# Altium PCB RTL8211.PcbDoc
Units mil, origin at the board's own origin, x right, y up, seen from the top; angles counter-clockwise.
Board outline 2605.89 x 1607.43 mil, 2 copper layers (Top Layer, Bottom Layer); 64 components, 66 nets, 272 pads, 9 vias.
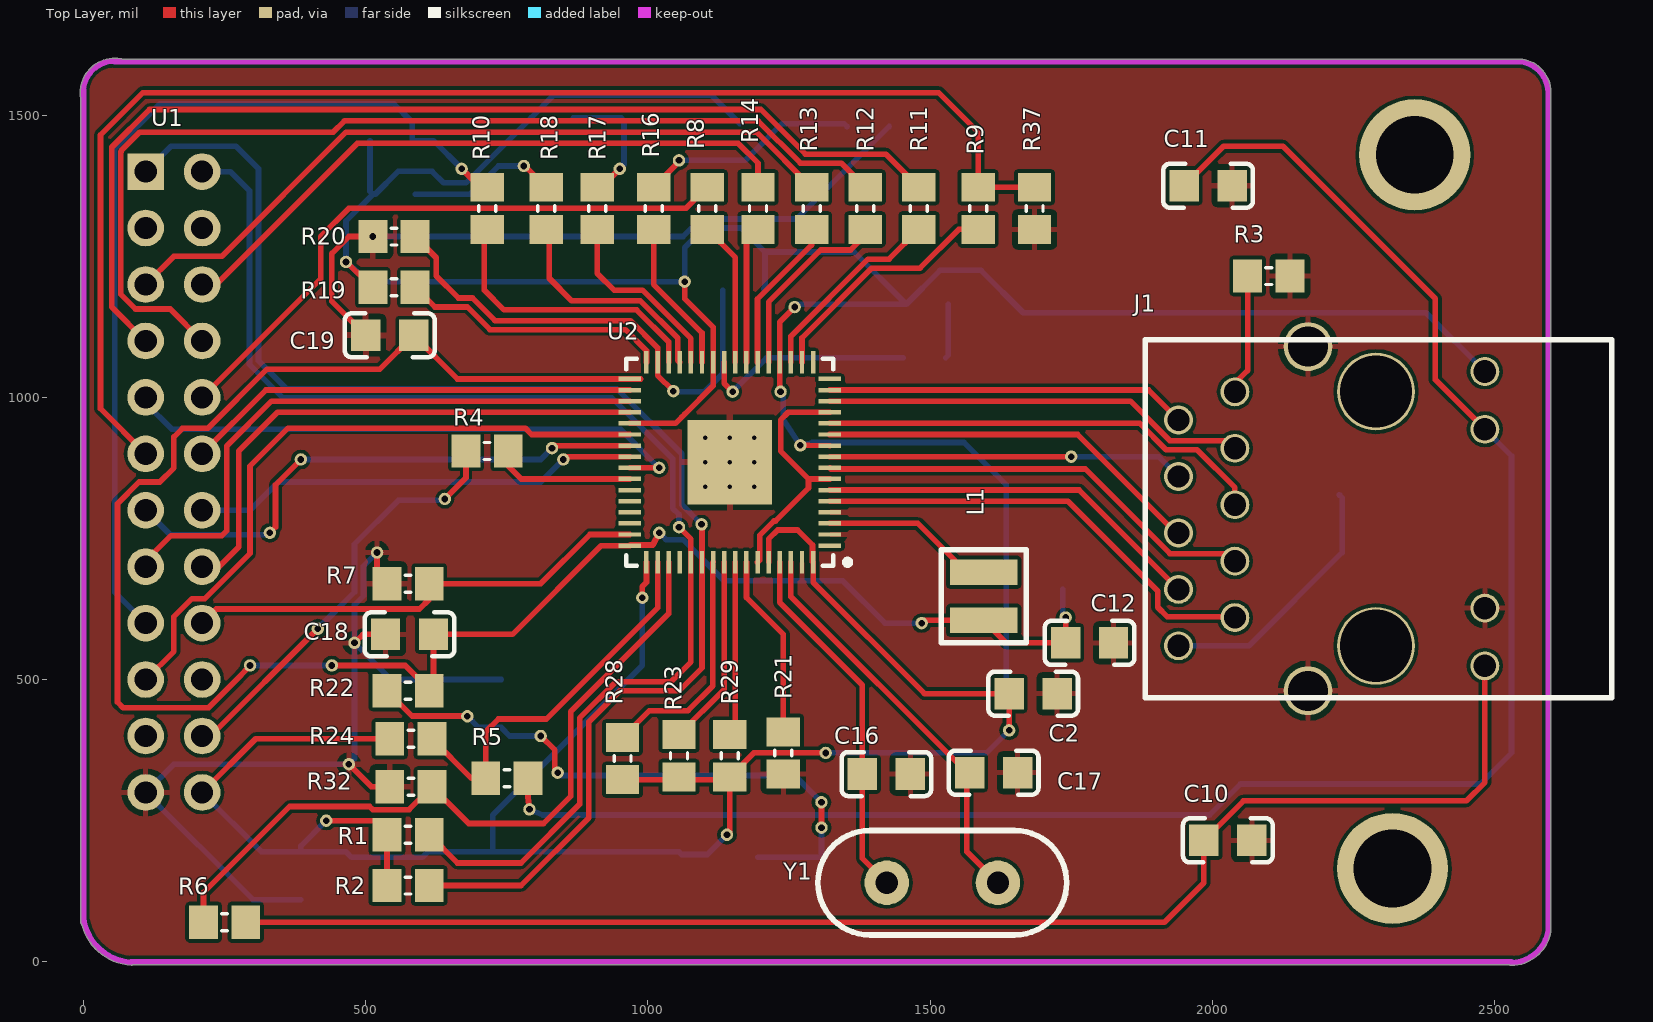
[diagram p0: Top Layer view]
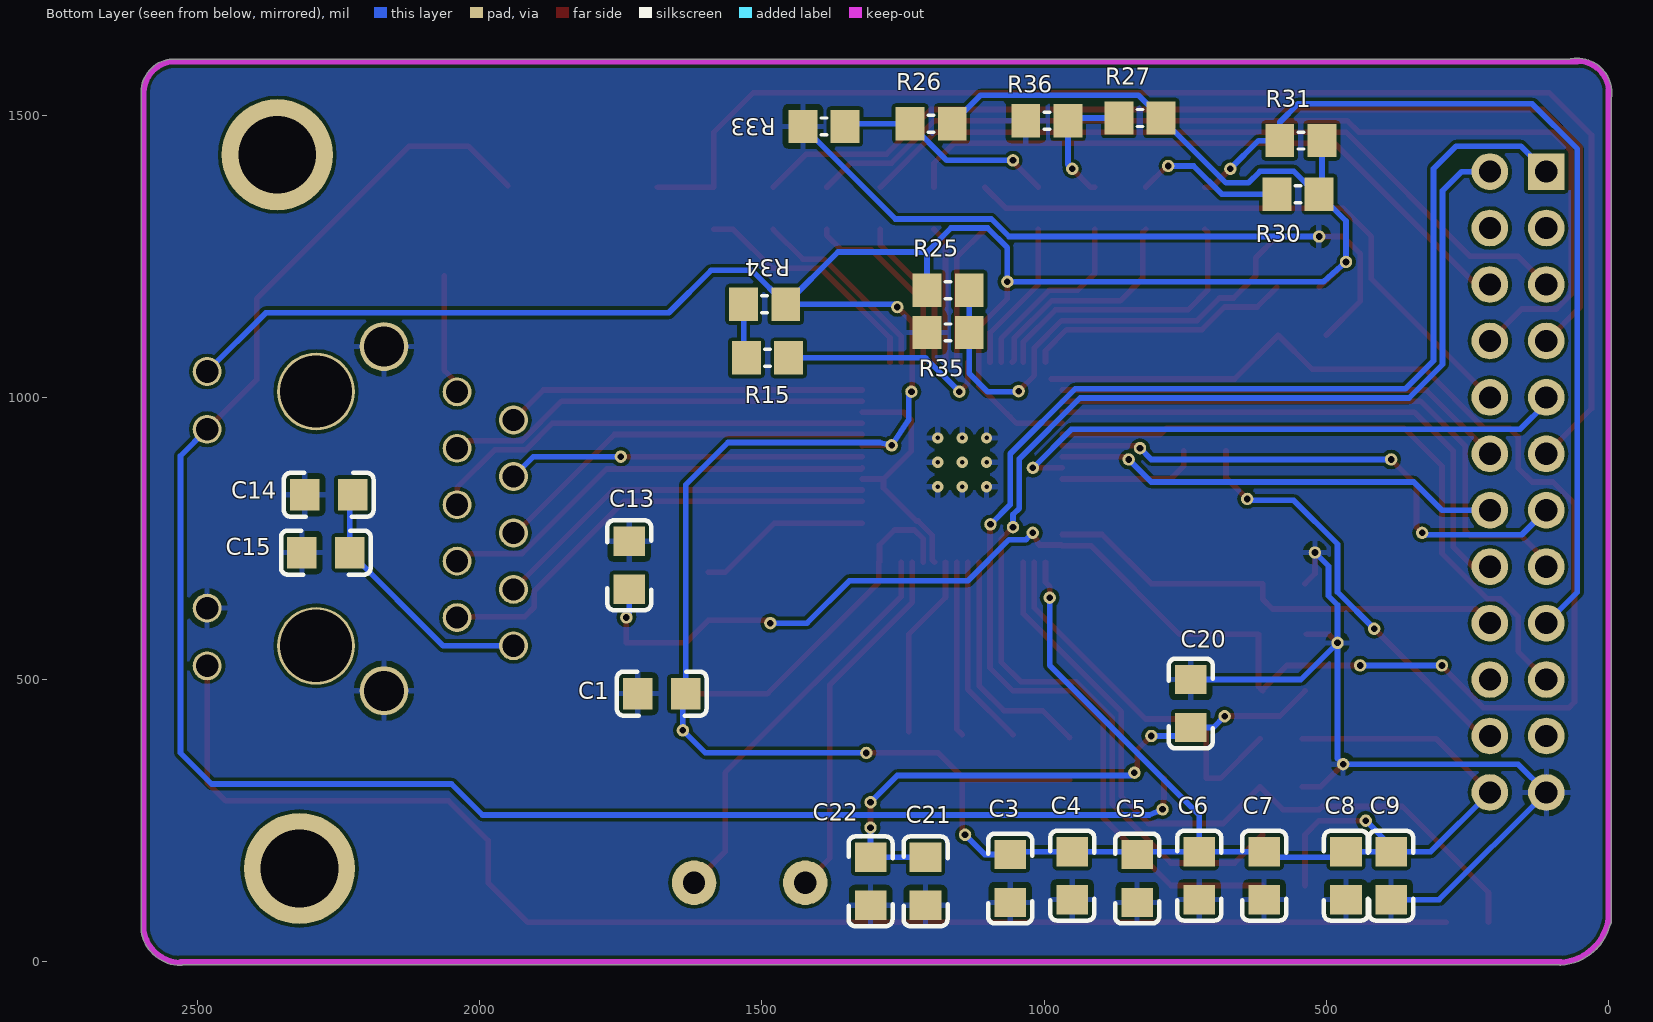
[diagram p1: Bottom Layer view, seen from below]

## Layer stack, top to bottom
Top Solder: solder mask 0.4, Solder Resist, Dk 3.5
Top Layer: signal copper 1.4
Dielectric1: dielectric 12.6, FR-4, Dk 4.8
Bottom Layer: signal copper 1.4
Bottom Solder: solder mask 0.4, Solder Resist, Dk 3.5

## Board outline
-3.27,66.19 cw(c0,70) -5.01,70 -5.01,1529.56 cw(c55,1540) 65.9,1599.93 cw(c65,1595) 67.21,1599.5 2547.78,1599.5 cw(c2547.78,1594.49) 2549.14,1599.32 cw(c2540,1540) 2599.61,1546.98 cw(c2595,1545) 2600.02,1545 2600.02,55 cw(c2595,55) 2599.96,54.24 cw(c2529.07,65.14) 2530.09,-6.57 cw(c2530.02,-1.56) 2526.39,-5.02 87.76,-5.02 cw(c84.64,-1.08) 84.35,-6.09 cw(c90,90)

## Design rules (kind name [scope] priority, off if disabled: settings)
Clearance [All] p1: gap=6 ignorepadtopadclearanceinfootprint=FALSE except(0: Arc-Hole Track-Hole SMDPad-Hole THPad-Hole Via-Hole Fill-Hole Poly-Hole Region-Hole Text-Hole)
ComponentClearance [All] p1: gap=0 collisioncheckmode=3 verticalgap=10 showdistances=FALSE
Height [All] p1: minheight=0 maxheight=1000 prefheight=0
HoleSize [All] p1: absolutevalues=TRUE maxlimit=138 minlimit=1 maxpercent=80.000 minpercent=20.000
MinimumSolderMaskSliver [All] p1: minsoldermaskwidth=3.8
PolygonConnect [All] p1: connectstyle=Relief reliefconductorwidth=10 reliefentries=4 polygonreliefangle="90 Angle" airgapwidth=10
RoutingVias [All] p1: holewidth=28 width=50 viastyle="Through Hole" minholewidth=28 minwidth=50 maxholewidth=28 maxwidth=50
SilkToSilkClearance [All] p1: silktosilkclearance=0
SilkToSolderMaskClearance [IsPad] p1: minsilkscreentomaskgap=0 clearancetoexposedcopper=TRUE
SolderMaskExpansion [All] p1: expansion=4
Width [All] p1: maxlimit=10 minlimit=6 preferedwidth=10 minimp=50.000000 maximp=50.000000 favimp=50.000000
24 further rules are at their usual default settings.

## Components (designator, comment, footprint, x,y, rotation, side; value= is the part's Value field where it differs from the comment)
C1 "22uF" 0805C 1680,480 r180 bottom
C2 "0.1uF" 0805C 1685,470 r180 top
C3 "22uF" 0805C 1065,145 r90 bottom
C4 "0.1uF" 0805C 955,150 r90 bottom
C5 "0.1uF" 0805C 840,145 r90 bottom
C6 "0.1uF" 0805C 730,150 r90 bottom
C7 "0.1uF" 0805C 615,150 r90 bottom
C8 "0.1uF" 0805C 470,150 r90 bottom
C9 "0.1uF" 0805C 390,150 r90 bottom
C10 "0.1uF" 0805C 2030,210 r180 top
C11 "0.1uF" 0805C 1995,1370 r180 top
C12 "22uF" 0805C 1785,560 r180 top
C13 "0.1uF" 0805C 1730,705 r270 bottom
C14 "0.1uF" 0805C 2270,832.4 r180 bottom
C15 "0.1uF" 0805C 2275,730 r180 bottom
C16 "22pF" 0805C 1425,327.6 r180 top
C17 "22pF" 0805C 1615,330 r180 top
C18 "0.1uF" 0805C 575,585 r0 top
C19 "0.1uF" 0805C 540,1115 r0 top
C20 "0.1uF" 0805C 735,460 r270 bottom
C21 "0.1uF" 0805C 1215,140 r90 bottom
C22 "0.1uF" 0805C 1312.4,140 r90 bottom
J1 "HR911130A" HR911130A 1940,785 r270 top
L1 "2.2uH" Coil 1595,690 r270 top
R1 "Res" 0805 575,225 r180 top
R2 "Res" 0805 575,135 r180 top
R3 "Res" 0805 2100,1215 r180 top
R4 "Res" 0805 715,905 r180 top
R5 "Res" 0805 750,325 r180 top
R6 "Res" 0805 250,70 r180 top
R7 "Res" 0805 575,670 r180 top
R8 "Res" 0805 1105,1335 r90 top
R9 "Res" 0805 1585,1335 r90 top
R10 "Res" 0805 715,1335 r90 top
R11 "Res" 0805 1480,1335 r90 top
R12 "Res" 0805 1385,1335 r90 top
R13 "Res" 0805 1290,1335 r90 top
R14 "Res" 0805 1195,1335 r90 top
R15 "Res" 0805 1490,1070 r0 bottom
R16 "Res" 0805 1010,1335 r90 top
R17 "Res" 0805 910,1335 r90 top
R18 "Res" 0805 820,1335 r90 top
R19 "Res" 0805 550,1195 r180 top
R20 "Res" 0805 550,1285 r180 top
R21 "Res" 0805 1240,370 r270 top
R22 "Res" 0805 575,480 r180 top
R23 "Res" 0805 1055,365 r270 top
R24 "Res" 0805 580,395 r180 top
R25 "Res" 0805 1170,1190 r180 bottom
R26 "Res" 0805 1200,1485 r0 bottom
R27 "Res" 0805 830,1495 r0 bottom
R28 "Res" 0805 955,360 r90 top
R29 "Res" 0805 1145,365 r90 top
R30 "Res" 0805 550,1360 r0 bottom
R31 "Res" 0805 545,1455 r0 bottom
R32 "Res" 0805 580,310 r180 top
R33 "Res" 0805 1390,1480 r180 bottom
R34 "Res" 0805 1495,1165 r0 bottom
R35 "Res" 0805 1170,1115 r180 bottom
R36 "Res" 0805 995,1490 r180 bottom
R37 "Res" 0805 1685,1335 r270 top
U1 "MII" MII 110,200 r0 top
U2 "RTL8211EG" RTL8211EGQFN 1145,885 r180 top
Y1 "25MHz" XTAL 1425,140 r0 top

## Footprints (in the part's own frame and the unit in brackets; to place one, negate y for a bottom-side part, rotate by r counter-clockwise, add the part's x,y. Pads: shape width x height; smd on the part's side, far side on the other; paste and mask are expansions set on the pad)
0805 [mm]
  rect 1.3x1.5 smd: 1(-0.95,0) 2(0.95,0)
  silkscreen extent -0.13,-0.38 0.13,0.38
0805C [mil]
  rect 52x56 smd: 1(-40,-5) 2(45,-5)
  silkscreen extent -77,-44 82,34
Coil [mm]
  rect 1.14x3.05 smd: 1(0,0) 2(2.16,0)
  silkscreen extent -1.02,-1.91 3.18,1.91
HR911130A [mm]
  round 1.3 hole 1: 1(5.72,0) 2(4.45,2.54) 3(3.18,0) 4(1.91,2.54) 5(0.64,0) 6(-0.63,2.54) 7(-1.9,0) 8(-3.17,2.54) 9(-4.44,0) 10(-5.71,2.54)
  round 1.3 hole 1.02: 11(6.624,13.79) 12(4.025,13.79) 13(-4.025,13.79) 14(-6.625,13.79)
  round 2.2 hole 1.8: 15(7.745,5.83) 16(-7.745,5.83)
  round 3.5 hole 3.25: 17(5.721,8.89) 18(-5.721,8.89)
  silkscreen extent -8.05,-1.5 8.05,19.5
MII [mm]
  rect 1.65x1.65 hole 1: 1(0,30.48)
  round 1.65 hole 1: 2(0,27.94) 3(0,25.4) 4(0,22.86) 5(0,20.32) 6(0,17.78) 7(0,15.24) 8(0,12.7) 9(0,10.16) 10(0,7.62) 11(0,5.08) 12(0,2.54) 13(2.54,2.54) 14(2.54,5.08) 15(2.54,7.62) 16(2.54,10.16) 17(2.54,12.7) 18(2.54,15.24) 19(2.54,17.78) 20(2.54,20.32) 21(2.54,22.86) 22(2.54,25.4) 23(2.54,27.94) 24(2.54,30.48)
RTL8211EGQFN [mm] "QFN, 64-Leads, Body 9.00x9.00mm, Pitch 0.50mm, Thermal Pad 3.80x3.80mm, IPC Medium Density"
  rect 1x0.2 smd: 1(-4.5,3.75) 2(-4.5,3.25) 3(-4.5,2.75) 4(-4.5,2.25) 5(-4.5,1.75) 6(-4.5,1.25) 7(-4.5,0.75) 8(-4.5,0.25) 9(-4.5,-0.25) 10(-4.5,-0.75) 11(-4.5,-1.25) 12(-4.5,-1.75) 13(-4.5,-2.25) 14(-4.5,-2.75) 15(-4.5,-3.25) 16(-4.5,-3.75) 33(4.5,-3.75) 34(4.5,-3.25) 35(4.5,-2.75) 36(4.5,-2.25) 37(4.5,-1.75) 38(4.5,-1.25) 39(4.5,-0.75) 40(4.5,-0.25) 41(4.5,0.25) 42(4.5,0.75) 43(4.5,1.25) 44(4.5,1.75) 45(4.5,2.25) 46(4.5,2.75) 47(4.5,3.25) 48(4.5,3.75)
  rect 0.2x1 smd: 17(-3.75,-4.5) 18(-3.25,-4.5) 19(-2.75,-4.5) 20(-2.25,-4.5) 21(-1.75,-4.5) 22(-1.25,-4.5) 23(-0.75,-4.5) 24(-0.25,-4.5) 25(0.25,-4.5) 26(0.75,-4.5) 27(1.25,-4.5) 28(1.75,-4.5) 29(2.25,-4.5) 30(2.75,-4.5) 31(3.25,-4.5) 32(3.75,-4.5) 49(3.75,4.5) 50(3.25,4.5) 51(2.75,4.5) 52(2.25,4.5) 53(1.75,4.5) 54(1.25,4.5) 55(0.75,4.5) 56(0.25,4.5) 57(-0.25,4.5) 58(-0.75,4.5) 59(-1.25,4.5) 60(-1.75,4.5) 61(-2.25,4.5) 62(-2.75,4.5) 63(-3.25,4.5) 64(-3.75,4.5)
  rect 3.8x3.8 smd: 65(0,0)
  silkscreen extent -5.43,-4.65 4.65,4.65, body extent -4.5,-4.5 4.5,4.5, height 1
XTAL [mm]
  round 2 hole 1: 1(-0.047,0) 2(4.953,0)
  silkscreen extent -3.15,-2.35 8.05,2.35

## Part data
C1 C2 C3 C4 C5 C6 C7 C8 C9 C10 C11 C12 C13 C14 C15 C16 C17 C18 C19 C20 C21 C22: library part Cap, "Capacitor"
L1: library part Coil
R1 R2 R3 R4 R5 R6 R7 R8 R9 R10 R11 R12 R13 R14 R15 R16 R17 R18 R19 R20 R21 R22 R23 R24 R25 R26 R27 R28 R29 R30 R31 R32 R33 R34 R35 R36 R37: "Resistor"
Y1: library part XTAL

## Free pads (board coordinates)
  round 22.05 hole 11.81: 0(1065,1205) 4(465,1240) 5(1260,1160) 6(1150,1010) 7(1750,895) 9(790,270) 11(990,645) 14(1307.5,237.5) 15(1307.4,282.6) 16(840,335) 17(810,400) 18(430,250) 18(680,435) 21(830,910) 22(850,890) 23(1019.84,875.16) 25(415,590) 27(640,820) 29(1055,770) 30(1095,775) ""(295,525) ""(330,760) ""(385,890) ""(440,525) ""(470,350) ""(480,565) ""(512.6,1285) ""(520,725) ""(670,1405) ""(780,1410) ""(950,1405) ""(1020,760) ""(1045,1011.07) ""(1055,1420) ""(1140,225) ""(1235,1010) ""(1270,914.96) ""(1315,370) ""(1485,600) ""(1640,410) ""(1740,610)
  round 196.85 hole 137.8: ""(2319.25,165.12) ""(2358.62,1429.88)

## Via types
v1: diameter 19.68, hole 7.87, Top Layer to Bottom Layer, 9 vias

## Nets (pads, with @x,y where several pads share a name; then routed paths per layer and width w, separated by ;. In a path a pad name is that pad's centre, name@x,y a point inside that pad or via, vN(x,y) a via of type N, cw(c..) or ccw(c..) an arc to the next point about the centre after c; other vN are vias at no path point)
3.3V: C1.2 C2.2 C3.2 C4.2 C5.2 C6.2 C7.2 C8.2 C9.2 J1.14 pad.0 pad.4 pad.5 pad.11 pad.18@430,250 pad.@1140,225 pad.@1235,1010 pad.@1270,914.96 pad.@1315,370 pad.@1640,410 R1.2 R2.2 R19.2 R23.2 R24.2 R25.1 R26.1 R27.1 R28.1 R29.1 R30.1 R31.1 R34.1 U1.13 U2.10 U2.20 U2.26 U2.37 U2.49 U2.60 U2.64 | length 8936.9
  Top Layer w10: U1.13 305,395 R24.2 ; pad.18@430,250 512.6,250 R1.2 R2.2 ; pad.4 R19.2 ; R28.1 R29.1@1140,322.6 ; U2.37 1048.9,953.9 1059.2,964.2 1059.2,964.36 1065.64,970.8 1065.8,970.8 1115.47,1020.47 U2.26 1115.47,1124.53 1065,1175 pad.0 ; pad.11 990,665 997.36,672.36 U2.49 ; pad.@1140,225 1145,230 R29.1 1187.4,370 pad.@1315,370 ; U2.60 1213.9,748.9 1230,765 1265,765 1291.48,738.52 1291.48,708.99 U2.64 1292.64,672.36 1490,475 C2.2 pad.@1640,410 ; pad.@1235,1010 1233.58,1011.42 U2.20 1233.58,1133.58 pad.5 ; 1285,915 1270,914.96 U2.10
  Bottom Layer w10: U1.13 315,195 C9.2 ; pad.18@430,250 385,205 C9.2 ; R31.1 507.6,1365 R30.1 ; pad.11 990,525 725,260 C6.2 ; pad.@1140,225 1105,190 C3.2 1055,195 C4.2 C6.2 ; R26.1 1112.07,1535.53 833.13,1535.53 R27.1 677.6,1380 638.08,1380 617.55,1400.53 557.26,1400.53 516.73,1360 R30.1 ; R25.1@1205,1192.4 R25.1 1207.4,1257.6 ; pad.@1235,1010 1240,1005 1240,960 1270,914.96 1290.94,920 1560,920 1635,845 C1.2 1640,470 1640,410 1600,370 pad.@1315,370 ; pad.5 1265,1165 R34.1 ; J1.14 2378.74,1150 1665,1150 1590,1225 1517.6,1225 R34.1 ; C9.2 C8.2 475,185 600,185 C7.2 C6.2 ; R30.1 465,1312.4 pad.4 505,1205 pad.0 1065,1265 1100,1300 1165,1300 1207.4,1257.6 ; 1207.4,1257.6 1365,1257.6 R34.1
AVDD10: U2.7 U2.13 U2.59 | length 442.1
  Top Layer w10: U2.59 1197.9,711.52 1197.9,755.53 1223.37,781 1226,781 1284.53,839.53 1284.53,855.47 ; U2.7 1284.53,855.47 ; U2.13 1248.58,973.58 1235,960 1235,905 1284.53,855.47
COL: pad.@1045,1011.07 R20.1 R25.2 R35.2 U2.31 | length 867.7
  Top Layer w10: R20.1 625,1247.4 625,1215 664,1176 689,1176 729,1136 969,1136 1017.05,1087.95 U2.31 1017.05,1039.02 pad.@1045,1011.07
  Bottom Layer w10: pad.@1045,1011.07 1046.07,1010 1100,1010 1132.6,1042.6 R35.2 R25.2
CRS: R19.1 U2.32 | length 477
  Top Layer w10: R19.1 622.4,1160 680,1160 720,1120 960,1120 997.36,1082.64 U2.32
DVDD10: C12.2 C13.2 C18.2 C19.2 L1.2 pad.@295,525 pad.@440,525 pad.@1020,760 pad.@1485,600 pad.@1740,610 R22.1 U2.33 U2.48 | length 3558.6
  Top Layer w10: pad.@295,525 275,503.51 221.49,450 70,450 60,460 60,811.49 98.51,850 135,850 160,875 160,930 175,945 220,945 325,1050 525,1050 C19.2 662.36,1032.64 U2.33 U2.33@987.36,1032.64 ; pad.@440,525 570,525 612.4,482.6 R22.1 620,487.6 C18.2 760,580 917.36,737.36 U2.48 968.99,738.52 1008.52,738.52 pad.@1020,760 ; pad.@1485,600 1489.96,604.96 L1.2 1634.96,565 C12.2 pad.@1740,610
  Bottom Layer w10: pad.@295,525 pad.@440,525 ; pad.@1020,760 1032.02,747.98 1062.02,747.98 1135,675 1345,675 1420,600 pad.@1485,600 ; C13.2 1735,615 pad.@1740,610
ENSWREG: R29.2 U2.57 | length 309.5
  Top Layer w10: R29.2 1154.84,412.24 U2.57
GND: C1.1 C2.1 C3.1 C4.1 C5.1 C6.1 C7.1 C8.1 C9.1 C10.1 C11.1 C12.1 C13.1 C14.1 C15.1 C16.1 C17.1 C18.1 C19.1 C20.1 C21.1 C22.1 J1.12 J1.15 J1.16 pad.@470,350 pad.@480,565 pad.@512.6,1285 pad.@520,725 R3.1 R7.2 R20.2 R21.2 R32.2 R33.1 R35.1 R36.1 R37.2 U1.12 U2.2 U2.4 U2.63 U2.65 | length 2880.2
  Top Layer w10: pad.@470,350 510,310 R32.2 ; pad.@480,565 495,580 C18.1 ; C19.1 440,1170 440,1255 470,1285 R20.2 ; pad.@520,725 520,687.6 R7.2
  Bottom Layer w10: C9.1 300,110 U1.12 160,350 470,350 480,360 pad.@480,565 ; pad.@512.6,1285 1062.37,1285 1093.37,1316 1263.4,1316 R33.1 ; pad.@520,725 496,701 496,648.37 480,632.37 pad.@480,565 ; C20.1 545,500 pad.@480,565
  other v1: 1101.69,841.69 1145,841.69 1188.31,841.69 1101.69,885 1145,885 1188.31,885 1101.69,928.31 1145,928.31 1188.31,928.31
GTXCLK: U1.19 U2.34 | length 804.6
  Top Layer w10: U1.19 322.95,1012.95 U2.34
MDC: pad.29 R1.1 U1.24 U2.53 | length 2319.6
  Top Layer w10: R1.1 662.4,175 775,175 879,279 879,431.63 943.37,496 1041,496 1076.1,531.1 U2.53 1076.1,748.9 pad.29
  Bottom Layer w10: U1.24 260,1400 294,1366 294,1058.37 353.37,999 936,999 1044,891 1044,803.37 1055,792.37 pad.29
MDIO: pad.30 R2.1 U1.1 U2.54 | length 2530.4
  Top Layer w10: R2.1 775,135 895,255 895,425 950,480 1055,480 1095.79,520.79 U2.54 1095.79,769.21 1095,770 pad.30
  Bottom Layer w10: U1.1 155,1445 270,1445 310,1405 310,1065 360,1015 945,1015 1060,900 1060,810 pad.30
NetC10_2: C10.2 J1.11 R6.1 | length 2548.4
  Top Layer w10: R6.1 1915,70 1985,140 C10.2 2055,285 2450,285 2482.91,317.91 J1.11
NetC11_2: C11.2 J1.13 pad.9 R5.1 | length 3289.5
  Top Layer w10: R5.1 787.4,292.6 pad.9 ; C11.2 2020,1445 2125,1445 2395,1175 2395,1031.38 J1.13
  Bottom Layer w10: pad.9 813.33,260 1995,260 2050,315 2475,315 2530,370 2530,896.38 J1.13
NetC14_2: C14.2 C15.2 J1.1 | length 462.9
  Bottom Layer w10: J1.1 2064.8,559.8 C15.2 2230,822.4 C14.2
NetC16_2: C16.2 U2.61 Y1.1 | length 646.4
  Top Layer w10: U2.61 1233.58,636.42 1380,490 C16.2 1380,183.15 Y1.1
NetC17_2: C17.2 U2.62 Y1.2 | length 719.7
  Top Layer w10: U2.62 1253.27,646.73 1565,335 1565,195 Y1.2
NetC20_2: C20.2 C21.2 C22.2 pad.14 pad.15 pad.16 pad.17 pad.18@680,435 R22.2 | length 1089
  Top Layer w10: R22.2 582.07,435.53 679.47,435.53 pad.18@680,435 ; pad.17 835,375 835,340 pad.16 ; pad.15@1305,285 pad.15 pad.14
  Bottom Layer w10: pad.18@680,435 700,415 C20.2 755,400 pad.17 ; pad.16 845,330 1260,330 pad.15 ; C21.2@1195,185 C21.2 C22.2 pad.14 pad.14@1305,235
NetJ1_2: J1.2 U2.5 | length 820
  Top Layer w10: U2.5 1743.9,816.1 1903.41,656.59 1903.41,628.06 1920,611.47 2038.34,611.47 J1.2
NetJ1_3: J1.3 U2.6 | length 690.7
  Top Layer w10: U2.6 1764.02,835.79 J1.3
NetJ1_4: J1.4 U2.8 | length 786.3
  Top Layer w10: U2.8 1324.35,872.98 1775.08,872.98 1924.84,723.21 2026.59,723.21 J1.4
NetJ1_5: J1.5 U2.11 | length 690.1
  Top Layer w10: U2.11 1761.31,934.21 1935.72,759.8 J1.5
NetJ1_6: J1.6 U2.12 | length 795.2
  Top Layer w10: U2.12 1871.53,953.9 1918.22,907.21 1972.79,907.21 2040,840 J1.6
NetJ1_7: J1.7 pad.7 U2.9 | length 632.5
  Top Layer w10: U2.9 1749.84,894.84 pad.7
  Bottom Layer w10: pad.7 1904.8,895 J1.7
NetJ1_8: J1.8 U2.14 | length 752.4
  Top Layer w10: U2.14 1854.79,993.27 1924.84,923.21 2026.59,923.21 J1.8
NetJ1_9: J1.9 U2.15 | length 640
  Top Layer w10: U2.15 1887.05,1012.95 1940,960 J1.9
NetJ1_10: J1.10 R3.2 | length 214.6
  Top Layer w10: J1.10 2040,1025 2062.6,1047.6 R3.2
NetR4_1: R4.1 U2.42 | length 251.4
  Top Layer w10: R4.1 752.4,878.54 775.47,855.47 U2.42
NetR8_1: R8.1 U2.24 | length 256.1
  Top Layer w10: R8.1 1154.84,1247.76 U2.24
NetR9_1: R9.1 U2.18 | length 434.8
  Top Layer w10: U2.18 1272.95,1105.32 1396.63,1229 1482.08,1229 1550.67,1297.6 R9.1
NetR10_1: R10.1 U2.30 | length 510.5
  Top Layer w10: R10.1 710,1292.6 710,1190 745,1155 980,1155 1036.73,1098.27 U2.30
NetR11_1: R11.1 U2.19 | length 351.3
  Top Layer w10: U2.19 1253.27,1108.27 1390,1245 1427.4,1245 R11.1
NetR12_1: R12.1 U2.21 | length 337.3
  Top Layer w10: U2.21 1213.9,1168.9 1306.01,1261.01 1358.99,1261.01 1385,1287.01 R12.1
NetR13_1: R13.1 U2.22 | length 275.1
  Top Layer w10: U2.22 1194.21,1174.21 1290,1270 R13.1
NetR14_1: R14.1 U2.23 | length 243.9
  Top Layer w10: U2.23 1174.53,1277.13 R14.1
NetR15_1: pad.6 R15.1 U2.25 | length 385.8
  Top Layer w10: U2.25 1135.16,1024.84 pad.6
  Bottom Layer w10: pad.6 1210,1070 R15.1
NetR16_1: R16.1 U2.27 | length 271
  Top Layer w10: R16.1 1010,1200 1095.79,1114.21 U2.27
NetR17_1: R17.1 U2.28 | length 333.7
  Top Layer w10: R17.1 910,1220 940,1190 990.25,1190 1076.1,1104.15 U2.28
NetR18_1: R18.1 U2.29 | length 404.6
  Top Layer w10: R18.1 825,1292.6 825,1211 865,1171 986.63,1171 1052.73,1104.9 1052.73,1065.85 U2.29
NetR21_1: R21.1 U2.58 | length 327.6
  Top Layer w10: U2.58 1174.53,645.47 1240,580 R21.1
NetR23_1: R23.1 U2.56 | length 338.6
  Top Layer w10: R23.1 1135.16,482.56 U2.56
PHYAD0: R5.2 R24.1 U2.50 | length 682.9
  Top Layer w10: R24.1 687.4,325 R5.2 712.6,407.6 735,430 820,430 1017.05,627.05 U2.50
PHYAD1: R6.2 R32.1 U2.51 | length 1318.8
  Top Layer w10: R6.2 212.6,122.6 365,275 506.92,275 512.45,269.47 576.87,269.47 R32.1 682.4,245 815,245 863,293 863,443 1036.73,616.73 U2.51
PME: R28.2 U2.55 | length 417
  Top Layer w10: R28.2 1002.6,445 1071.01,445 1115,488.99 1115,707.36 U2.55
REGOUT: L1.1 U2.3 | length 308.8
  Top Layer w10: U2.3 1478.27,776.73 1565,690 L1.1
RESET: U1.10 U2.38 | length 1173.7
  Top Layer w10: U1.10 160,550 160,611.49 191.99,643.48 214.97,643.48 295,723.51 295,878.26 362.26,945.53 782.55,945.53 793.86,934.21 U2.38
RXCLK: R8.2 U1.20 | length 1093.2
  Top Layer w10: U1.20 420,1210 420,1285 470,1335 1067.6,1335 R8.2
RXD0: R11.2 U1.4 | length 1882.7
  Top Layer w10: U1.4 50,1160 50,1443.14 116.86,1510 1200,1510 1279,1431 1421.4,1431 R11.2
RXD1: R12.2 U1.21 | length 1822
  Top Layer w10: U1.21 153.48,1156.52 91.99,1156.52 66,1182.51 66,1435 66.52,1435.52 66.52,1437.04 99.48,1470 442.37,1470 462.37,1490 1195.03,1490 1270.03,1415 1342.4,1415 R12.2
RXD2: R13.2 U1.3 | length 1332.3
  Top Layer w10: U1.3 160,1250 245,1250 465,1470 1192.4,1470 R13.2
RXD3: R14.2 U1.22 | length 1145.6
  Top Layer w10: U1.22 235,1200 485,1450 1160,1450 1195,1415 R14.2
RXD4: R15.2 R34.2 | length 97.1
  Bottom Layer w10: R15.2 1532.4,1075 R34.2
RXD5: pad.@1055,1420 R16.2 R26.2 R33.2 | length 392.2
  Top Layer w10: R16.2 1047.6,1410 pad.@1055,1420
  Bottom Layer w10: pad.@1055,1420 1172.4,1420 R26.2 1347.6,1485 R33.2
RXD6: pad.@950,1405 R17.2 R27.2 R36.2 | length 233.9
  Top Layer w10: R17.2 917.4,1372.4 pad.@950,1405
  Bottom Layer w10: R27.2 952.6,1495 R36.2 957.6,1412.6 pad.@950,1405
RXD7: pad.@780,1410 R18.2 R30.2 | length 268.9
  Top Layer w10: pad.@780,1410 782.4,1410 R18.2
  Bottom Layer w10: R30.2 685,1360 735,1410 pad.@780,1410
RXDV: R9.2 R37.1 U1.6 | length 2410.8
  Top Layer w10: U1.6 30,980 30,1465 105,1540 1515,1540 1585,1470 R9.2 R37.1
RXER: pad.@670,1405 R10.2 R31.2 U1.9 | length 1636.2
  Top Layer w10: pad.@670,1405 702.6,1372.4 R10.2
  Bottom Layer w10: U1.9 55,655 55,1440 135,1520 550,1520 582.4,1487.6 R31.2 620,1455 pad.@670,1405
TXCLK: pad.25 pad.27 R4.2 U1.14 | length 754.3
  Top Layer w10: U1.14 225,400 pad.25 ; pad.27 677.6,857.6 R4.2
  Bottom Layer w10: pad.25 480,655 480,740 557.5,817.5 637.5,817.5 pad.27
TXD0: U1.17 U2.36 | length 970.7
  Top Layer w10: U1.17 240,700 275,735 275,905 343.58,973.58 U2.36
TXD1: pad.21 pad.@330,760 pad.@385,890 U1.7 U2.39 | length 985.6
  Top Layer w10: pad.@330,760 340,770 340,845 pad.@385,890 ; pad.21 835,915 835.47,914.53 U2.39
  Bottom Layer w10: U1.7 153.48,756.52 326.52,756.52 pad.@330,760 ; pad.@385,890 810,890 pad.21
TXD2: pad.22 U1.18 U2.40 | length 800.2
  Top Layer w10: pad.22 850,895 850.16,894.84 U2.40
  Bottom Layer w10: U1.18 295,800 345,850 810,850 pad.22
TXD3: pad.23 U1.5 U2.41 | length 1019.6
  Top Layer w10: U2.41 pad.23 pad.23@1020,875
  Bottom Layer w10: U1.5 110,990 156.52,943.48 951.52,943.48 pad.23
TXD4: U2.43
TXD5: U2.44
TXD6: U2.45
TXD7: U2.46
TXEN: U1.8 U2.35 | length 1073
  Top Layer w10: U1.8 110,710 155,755 245,755 253.48,763.48 253.48,913.48 333.27,993.27 U2.35
TXER: R7.1 U1.16 U2.47 | length 839.1
  Top Layer w10: U1.16 235,625 595,625 612.4,642.4 R7.1 810,670 897.05,757.05 U2.47
pads on no net: J1.17 J1.18 U1.2 U1.11 U1.15 U1.23 U2.1 U2.16 U2.17 U2.52

## Polygon pours and split planes (outlines as drawn)
GND on Bottom Layer "Top Layer-No Net" (solid, remove dead copper, pour order 30): -200,1735 -140,1795 2915,1795 3000,1710 3000,-245 2935,-180 -185,-180
GND on Top Layer "Top Layer-No Net" (solid, remove dead copper, pour order 32): -235,1865 -195,1825 3260,1825 3005,1570 3005,-230 -465,-230 -485,-210

## Keep-outs
Keep-Out Layer:
  lines w10: 0,70 0,1545 ; 0,75 ccw(c90,90) 84.64,-1.08 ; 0,1530 cw(c55,1540) 65,1595 ; 55,1594.49 2547.78,1594.49 ; 84.64,0 2530.02,0 ; 2530.02,-1.56 ccw(c2529.07,65.14) 2595,55 2595,1545 ; 2547.78,1594.45 cw(c2540,1540) 2595,1540